# EAGLE board Panel (EAGLE 9.2.2)
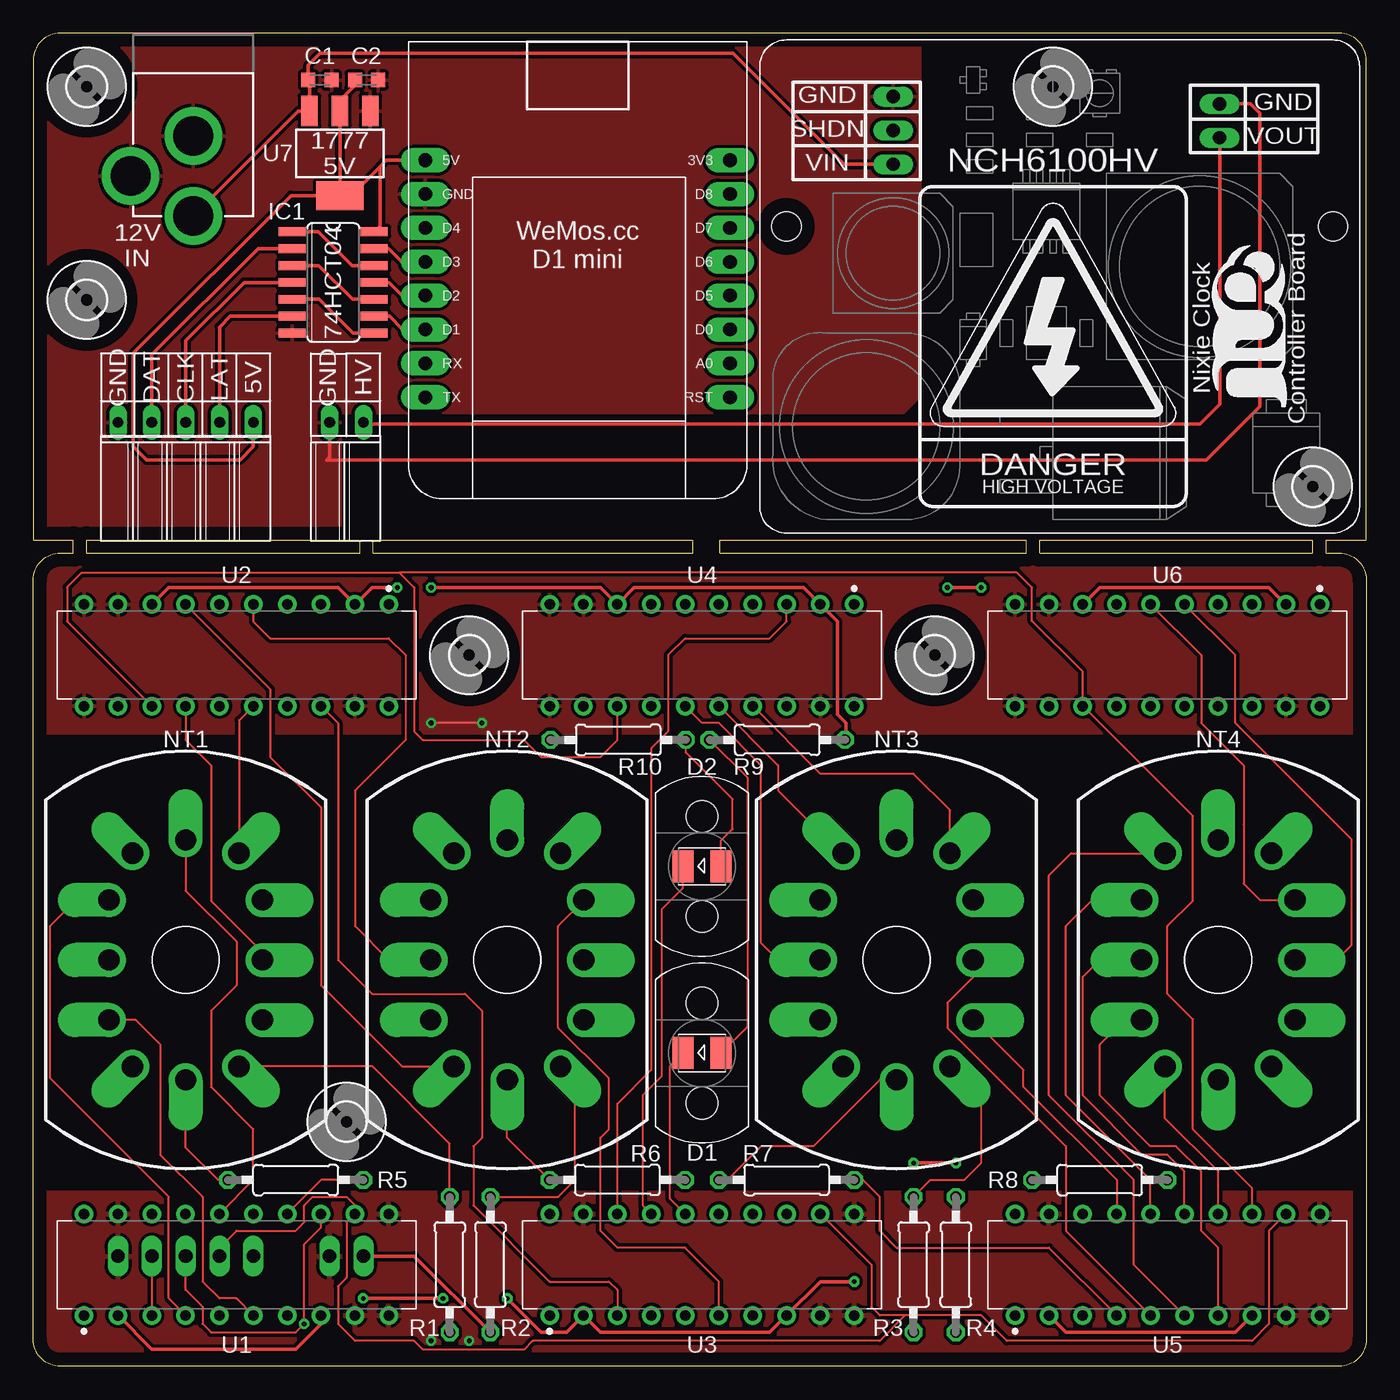
[diagram p0: board, top side]
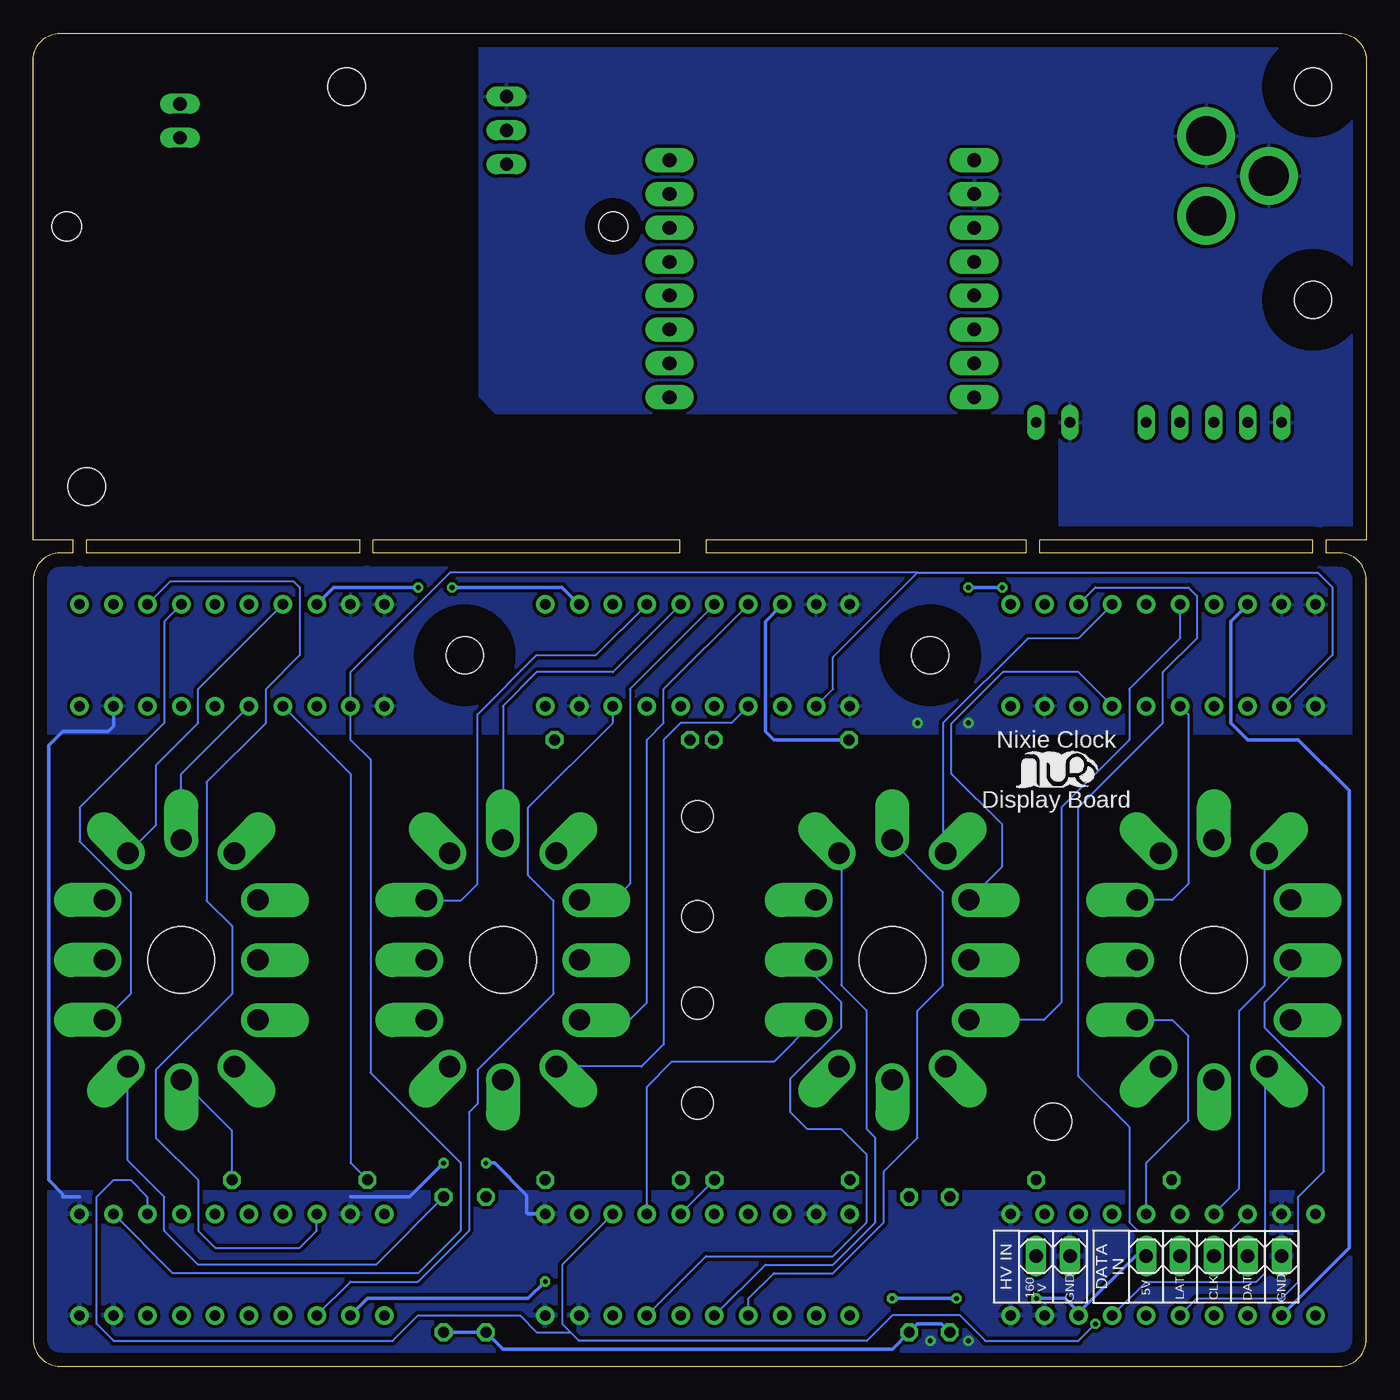
[diagram p1: board, bottom side, seen from below]

Size 100 x 100 mm. Coordinates in mm from the lower left corner, seen from the top.
Outline: 2,0 arc-90 0,2 0,59 arc-90 2,61 3,61 3,62 0,62 0,98 arc-90 2,100 98,100 arc-90 100,98 100,62 97,62 97,61 98,61 arc-90 100,59 100,2 arc-90 98,0 2,0
Outline: 4,61 24.5,61 24.5,62 4,62 4,61
Outline: 25.5,61 49.5,61 49.5,62 25.5,62 25.5,61
Outline: 51.5,61 74.5,61 74.5,62 51.5,62 51.5,61
Outline: 75.5,61 96,61 96,62 75.5,62 75.5,61
Copper layers (1*16): Top 0.035mm / dielectric 1.5mm / Bottom 0.035mm
Design rules "2layer *": minimum track width 6mil, minimum drill 0.35mm, track to track 8mil, track to pad 8mil, pad to pad 8mil, via to via 8mil, smd to smd 6mil, copper to edge 40mil, drill to drill 6mil, minimum pad ring 10mil, minimum via ring 8mil, stop-mask expansion 4mil, vias tented up to drill 40mil, thermal gap 10mil

## Footprints (pad centres in the part's own frame; a part is rotated, then mirrored left to right if it is on the bottom)
C0603K = smd 1.05 x 1.08: 1 -0.875,0; 2 0.875,0
WL-SITW_154141XXBA210 = smd 1.6 x 2.4: 1 -1.425,0; 2 1.425,0
1X05 = drill 1.016 long: 1 -5.08,0; 2 -2.54,0; 3 0,0; 4 2.54,0; 5 5.08,0
FE05W = drill 0.813 long: 1 -5.08,0; 2 -2.54,0; 3 0,0; 4 2.54,0; 5 5.08,0
1X02 = drill 1.016 long: 1 -1.27,0; 2 1.27,0
FE02W = drill 0.813 long: 1 -1.27,0; 2 1.27,0
SO-14 = smd 0.66 x 2.032: 1 -3.81,-3.073; 2 -2.54,-3.073; 3 -1.27,-3.073; 4 0,-3.073; 5 1.27,-3.073; 6 2.54,-3.073; 7 3.81,-3.073; 8 3.81,3.073; 9 2.54,3.073; 10 1.27,3.073; 11 0,3.073; 12 -1.27,3.073; 13 -2.54,3.073; 14 -3.81,3.073
IN-12 = drill 1.6 pad 2.54 offset: 0 5.75,-4.5; 1 -4,-8; 2 -5.75,-4.5; 3 -5.75,0; 4 -5.75,4.5; 5 -4,8; 6 0,9; 7 4,8; 8 5.75,4.5; 9 5.75,0; A 4,-8; LHDP 0,-9 | hole 5: 0,0
0207/10 = drill 0.813 octagon: 1 -5.08,0; 2 5.08,0
PDIP-20 = drill 0.786 pad 1.386: 1 -3.81,11.43; 2 -3.81,8.89; 3 -3.81,6.35; 4 -3.81,3.81; 5 -3.81,1.27; 6 -3.81,-1.27; 7 -3.81,-3.81; 8 -3.81,-6.35; 9 -3.81,-8.89; 10 -3.81,-11.43; 11 3.81,-11.43; 12 3.81,-8.89; 13 3.81,-6.35; 14 3.81,-3.81; 15 3.81,-1.27; 16 3.81,1.27; 17 3.81,3.81; 18 3.81,6.35; 19 3.81,8.89; 20 3.81,11.43
SOT-223 = smd 1.27 x 2.286: 1 -2.286,-3.175; 2 0,-3.175; 3 2.286,-3.175 | smd 3.556 x 2.159: TER 0,3.175
2,8 = hole 2.8: 0,0
MENTOR-1216.1005 = hole 2.4: -3.75,0; 3.75,0
NCH6100HV = drill 1 long: GND1 10,-4.25; GND2 34.5,-4.8; SHDN 10,-6.79; VIN 10,-9.33; VOUT 34.5,-7.34 | hole 2.2: 2,-14; 43,-14
POWER_JACK_PTH = drill 2.997 pad 4.318: GND 0,7.7; GNDBREAK 4.7,10.7; PWR 0,13.7
WEMOS-D1-MINI = drill 1.016 pad 1.829 long: 3V3 -11.43,-12.7; 5V 11.43,-12.7; A0 -11.43,2.54; D0 -11.43,0; D1 11.43,0; D2 11.43,-2.54; D3 11.43,-5.08; D4 11.43,-7.62; D5 -11.43,-2.54; D6 -11.43,-5.08; D7 -11.43,-7.62; D8 -11.43,-10.16; GND 11.43,-10.16; RESET -11.43,5.08; RX 11.43,2.54; TX 11.43,5.08

## Placement (x,y rotation side)
C1  1u  [C0603K]  21.5,96.5 0 top
C2  10u  [C0603K]  25,96.5 0 top
D1  RED/AMBER  [WL-SITW_154141XXBA210]  50.16,23.5 180 top
D2  RED/AMBER  [WL-SITW_154141XXBA210]  50.16,37.5 180 top
DATA  .1" Header  [1X05]  11.43,8.26 180 bottom
DATA1  [FE05W]  11.43,70.81 180 top
HV  .1" Header  [1X02]  23.5,8.26 180 bottom
HV1  1  [FE02W]  23.5,70.81 180 top
IC1  74HCT04D  [SO-14]  22.5,81.31 270 top
NT1  IN-12B  [IN-12]  11.43,30.48 0 top
NT2  IN-12B  [IN-12]  35.56,30.48 0 top
NT3  IN-12B  [IN-12]  64.77,30.48 0 top
NT4  IN-12B  [IN-12]  88.9,30.48 0 top
R1  22k  [0207/10]  31.24,7.62 270 top
R2  22k  [0207/10]  34.29,7.62 270 top
R3  22k+  [0207/10]  66.04,7.62 270 top
R4  22k  [0207/10]  69.22,7.62 270 top
R5  100k  [0207/10]  19.68,13.97 0 top
R6  100k  [0207/10]  43.81,13.97 180 top
R7  100k  [0207/10]  56.52,13.97 180 top
R8  100k  [0207/10]  80.01,13.97 0 top
R9  1k  [0207/10]  55.81,46.99 0 top
R10  1k  [0207/10]  43.88,46.99 180 top
U1  TPIC6B595N  [PDIP-20]  15.24,7.62 90 top
U2  TPIC6B595N  [PDIP-20]  15.24,53.34 270 top
U3  TPIC6B595N  [PDIP-20]  50.16,7.62 90 top
U4  TPIC6B595N  [PDIP-20]  50.16,53.34 270 top
U5  TPIC6B595N  [PDIP-20]  85.09,7.62 90 top
U6  TPIC6B595N  [PDIP-20]  85.09,53.34 270 top
U7  CJT1117-3.3-SOT223  [SOT-223]  23,91 180 top
U$1  [2,8]  67.63,53.34 0 top
U$2  [2,8]  32.7,53.34 0 top
U$3  [2,8]  23.5,18.34 0 top
U$4  [LOGO-SILKSCREEEN-S]  23.25,44.25 0 bottom
U$5  [MENTOR-1216.1005]  50.16,37.5 90 top
U$6  [MENTOR-1216.1005]  50.16,23.5 90 top
U$7  NCH6100HV  [NCH6100HV]  54.5,99.51 0 top
U$8  [LOGO-SILKSCREEN]  92.25,77.89 90 top
U$9  [2,8]  96,66 0 top
U$10  [2,8]  4,80 0 top
U$11  DC-JACK  [POWER_JACK_PTH]  12,100 180 top
U$12  WEMOS-D1  [WEMOS-D1-MINI]  40.84,77.78 180 top
U$13  [2,8]  4,96 0 top
U$14  [2,8]  76.5,96 0 top

## Library data of the parts
C1 C2 = rcl; SPICEPREFIX: C
D1 D2 = Wurth_Elektronik_Optoelectronics_rev18a
DATA HV = pinhead
DATA1 HV1 IC1 NT1-NT4 U1-U6 U$5-U$7 U$12 = NixieClock
R1-R10 = rcl; SPICEPREFIX: R
U7 = NixieClock; MPN: CJT1117-3.3
U$1-U$3 U$9 U$10 U$13 U$14 = holes
U$4 U$8 = OwnStuff
U$11 = Parts

## Nets
+3V3: U$12.3V3
+5V: C2.1 DATA1.1 IC1.14 U7.2 U7.TER U$12.5V
+12V: C1.1 U7.3 U$7.VIN U$11.PWR
DIG10: NT1.0 U1.15
DIG11: NT1.1 U1.7
DIG12: NT1.2 U1.6
DIG13: NT1.3 U1.5
DIG14: NT1.4 U1.4
DIG15: NT1.5 U1.17
DIG16: NT1.6 U1.16
DIG17: NT1.7 U2.16
DIG18: NT1.8 U2.15
DIG19: NT1.9 U2.14
DIG20: NT2.0 U3.14
DIG21: NT2.1 U2.7
DIG22: NT2.2 U2.6
DIG23: NT2.3 U2.5
DIG24: NT2.4 U2.17
DIG25: NT2.5 U2.4
DIG26: NT2.6 U3.4
DIG27: NT2.7 U3.5
DIG28: NT2.8 U3.6
DIG29: NT2.9 U3.7
DIG30: NT3.0 U5.17
DIG31: NT3.1 U4.14
DIG32: NT3.2 U4.7
DIG33: NT3.3 U4.15
DIG34: NT3.4 U4.6
DIG35: NT3.5 U4.16
DIG36: NT3.6 U4.5
DIG37: NT3.7 U4.17
DIG38: NT3.8 U4.4
DIG39: NT3.9 U5.5
DIG40: NT4.0 U6.4
DIG41: NT4.1 U5.14
DIG42: NT4.2 U5.7
DIG43: NT4.3 U5.15
DIG44: NT4.4 U5.16
DIG45: NT4.5 U5.6
DIG46: NT4.6 U6.15
DIG47: NT4.7 U6.7
DIG48: NT4.8 U6.6
DIG49: NT4.9 U6.5
DOT1: R5.2 U1.14
DOT2: R6.1 U3.15
DOT3: R7.1 U5.4
DOT4: R8.1 U6.14
GND: DATA.1 HV.1 U1.9 U1.10 U1.11 U1.19 U2.9 U2.10 U2.11 U2.19 U3.9 U3.10 U3.11 U3.19 U4.9 U4.10 U4.11 U4.19 U5.9 U5.10 U5.11 U5.19 U6.9 U6.10 U6.11 U6.19
GND1: C1.2 C2.2 DATA1.5 HV1.2 IC1.7 U7.1 U$7.GND1 U$7.GND2 U$11.GND U$11.GNDBREAK U$12.GND
LATCH: DATA.4 U1.12 U2.12 U3.12 U4.12 U5.12 U6.12
LED1: D1.2 U3.16
LED2: D2.2 U3.17
N$1: HV1.1 U$7.VOUT
N$2: IC1.5 IC1.8
N$3: IC1.3 IC1.10
N$4: IC1.1 IC1.12
N$6: DATA1.3 IC1.4
N$7: IC1.13 U$12.D3
N$8: DATA1.4 IC1.2
N$45: NT1.LHDP R5.1
N$46: NT2.LHDP R6.2
N$47: NT3.LHDP R7.2
N$48: NT4.LHDP R8.2
N$49: NT1.A R1.1
N$50: NT2.A R2.1
N$51: NT3.A R3.1
N$52: NT4.A R4.1
N$55: U1.18 U2.3
N$56: U2.18 U3.3
N$57: U3.18 U4.3
N$58: U4.18 U5.3
N$59: U5.18 U6.3
N$60: DATA1.2 IC1.6
N$62: IC1.9 U$12.D1
N$63: IC1.11 U$12.D2
N$66: D1.1 R9.1
N$67: D2.1 R10.1
SCLK: DATA.3 U1.13 U2.13 U3.13 U4.13 U5.13 U6.13
SDAT: DATA.2 U1.3
V+: HV.2 R1.2 R2.2 R3.2 R4.2
VCC: DATA.5 R9.2 R10.2 U1.2 U1.8 U2.2 U2.8 U3.2 U3.8 U4.2 U4.8 U5.2 U5.8 U6.2 U6.8

## Tracks (layer width: path | path; a pad name or v marks a point on that pad's centre or on a via)
+5V
  Top 0.254: U7.TER 23,87 26,90 | 26,90 26,85.55 IC1.14 | U7.TER U7.2 23,95 24.12,96.12 C2.1 | U$12.5V 26.48,90.48 26,90 | DATA1.1 16.51,69.01 15.5,68 8.5,68 7.5,69 7.5,76 19.32,87.83 U7.TER
+12V
  Top 0.254: U$7.VIN 60.82,90.18 52.5,98.5 21.5,98.5 20.62,97.62 C1.1 20.71,96.41 U7.3 19.88,94.17 U$11.PWR
DIG10
  Bottom 0.152: U1.15 16.51,15.24 13.34,18.41 13.34,24.77 14.55,25.98 NT1.0
DIG11
  Bottom 0.152: U1.7 16.51,6.35 8.26,6.35 7.62,6.99 7.62,22.29 NT1.1
DIG12
  Top 0.152: NT1.2 7.67,25.98 9.53,24.13 9.53,15.88 12.7,12.7 12.7,6.35 13.97,5.08 15.24,5.08 U1.6
DIG13
  Bottom 0.152: U1.5 12.7,5.08 6.35,5.08 5.08,6.35 5.08,12.7 3.17,14.61 3.17,20.95 7.62,25.4 7.62,27.3 5.68,29.25 NT1.3
DIG14
  Top 0.152: NT1.4 3.23,34.98 1.27,33.02 1.27,21.59 10.16,12.7 10.16,5.08 U1.4
DIG15
  Bottom 0.152: U1.17 9.53,13.34 9.53,26.67 7.62,28.57 7.62,38.29 NT1.5
DIG16
  Top 0.152: NT1.6 11.43,35.67 15.24,31.86 15.24,28.57 13.34,26.67 13.34,20.95 16.51,17.78 16.51,13.97 U1.16
DIG17
  Top 0.152: U2.16 15.43,48.45 NT1.7
DIG18
  Bottom 0.152: U2.15 13.34,48.9 13.34,36.2 14.55,34.98 NT1.8
DIG19
  Top 0.152: U2.14 11.43,46.99 13.34,45.09 13.34,34.92 17.18,31.08 NT1.9
DIG20
  Bottom 0.152: NT2.0 44.44,22.85 44.45,22.86 52.07,22.86 53.98,20.95 U3.14
DIG21
  Top 0.152: U2.7 17.78,50.8 17.78,45.72 21.59,41.91 21.59,28.57 27.68,22.48 NT2.1
DIG22
  Bottom 0.152: U2.6 13.97,54.61 17.78,50.8 17.78,46.99 22.86,41.91 22.86,27.3 24.18,25.98 NT2.2
DIG23
  Top 0.152: U2.5 16.51,55.88 17.78,54.61 26.67,54.61 27.94,53.34 27.94,46.99 24.13,43.18 24.13,33.02 26.67,30.48 NT2.3
DIG24
  Bottom 0.152: U2.17 21.59,52.07 27.27,52.07 31.11,48.23 31.11,44.45 27.3,40.64 27.3,37.48 NT2.4
DIG25
  Bottom 0.152: U2.4 21.59,54.61 25.4,54.61 31.75,48.26 31.75,38.67 NT2.5
DIG26
  Bottom 0.152: U3.4 46.35,5.08 44.45,6.99 40.01,6.99 36.2,10.79 36.2,14.61 33.66,17.14 33.66,26.67 31.75,28.57 31.75,35.56 35.56,39.37 NT2.6
DIG27
  Bottom 0.152: U3.5 45.09,7.62 40.01,7.62 36.83,10.79 36.83,17.14 37.47,17.78 37.47,26.67 39.37,28.57 39.37,38.29 NT2.7
DIG28
  Top 0.152: U3.6 51.44,6.35 48.9,8.89 43.81,8.89 42.55,10.16 42.55,17.14 43.18,17.78 43.18,21.59 39.37,25.4 39.37,33.02 41.31,34.96 NT2.8
DIG29
  Bottom 0.152: U3.7 49.53,8.26 40.01,8.26 37.47,10.79 37.47,15.88 39.37,17.78 41.91,17.78 43.18,19.05 43.18,21.59 39.37,25.4 39.37,27.3 41.31,29.25 NT2.9
DIG30
  Top 0.152: NT3.0 70.54,25.98 74.3,22.23 74.3,20.95 81.28,13.97 U5.17
DIG31
  Bottom 0.152: NT3.1 54.35,22.48 52.7,24.13 52.7,46.99 51.44,48.26 47.62,48.26 U4.14
DIG32
  Bottom 0.152: U4.7 52.7,50.8 52.7,48.26 53.98,46.99 53.98,27.3 55.24,26.04 58.97,26.04 NT3.2
DIG33
  Top 0.152: NT3.3 55.88,30.48 54.61,31.75 54.61,45.09 51.44,48.26 50.16,48.26 U4.15
DIG34
  Bottom 0.152: U4.6 55.24,50.8 55.24,36.2 56.46,34.98 NT3.4
DIG35
  Top 0.152: U4.16 55.88,45.09 55.88,43.18 60.58,38.48 NT3.5
DIG36
  Bottom 0.152: NT3.6 64.77,49.53 62.23,52.07 56.52,52.07 U4.5
DIG37
  Top 0.152: NT3.7 68.77,41.72 66.04,44.45 59.05,44.45 U4.17
DIG38
  Bottom 0.152: NT3.8 70.47,34.92 67.94,34.92 66.67,36.2 66.67,48.9 62.23,53.34 57.78,53.34 U4.4
DIG39
  Top 0.152: NT3.9 70.52,29.21 68.58,27.27 68.58,25.4 77.47,16.51 77.47,10.16 U5.5
DIG40
  Bottom 0.152: U6.4 90.17,55.88 90.17,48.26 96.52,41.91 96.52,39.36 92.71,35.55 92.71,27.92 NT4.0
DIG41
  Top 0.152: U5.14 88.9,14.61 84.9,18.61 NT4.1
DIG42
  Top 0.152: U5.7 88.9,8.89 87.63,10.16 87.63,14.61 85.72,16.51 83.82,16.51 80.01,20.32 80.01,24.13 81.86,25.98 NT4.2
DIG43
  Top 0.152: NT4.3 80.01,30.48 78.74,29.21 78.74,20.32 83.19,15.88 85.09,15.88 86.36,14.61 U5.15
DIG44
  Top 0.152: U5.16 83.82,13.97 77.47,20.32 77.47,33.02 79.38,34.92 83.09,34.92 NT4.4
DIG45
  Top 0.152: U5.6 82.55,7.62 82.55,13.97 76.2,20.32 76.2,36.83 77.85,38.48 NT4.5
DIG46
  Bottom 0.152: U6.15 88.9,44.45 NT4.6
DIG47
  Bottom 0.152: U6.7 87.63,50.8 87.63,48.26 90.81,45.09 90.81,40.58 NT4.7
DIG48
  Top 0.152: U6.6 87.63,53.34 87.63,48.26 90.81,45.09 90.81,40.64 90.81,36.2 92.02,34.98 NT4.8
DIG49
  Top 0.152: U6.5 90.17,53.34 90.17,48.26 98.91,39.52 98.91,31.6 97.79,30.48 NT4.9
DOT1
  Top 0.152: R5.2 21.59,13.97 U1.14
DOT2
  Bottom 0.152: U3.15 R6.1
DOT3
  Top 0.152: R7.1 62.23,13.97 63.5,12.7 63.5,10.16 64.77,8.89 76.2,8.89 U5.4
DOT4
  Bottom 0.152: U6.14 76.2,44.45 76.2,15.24 R8.1
GND  (via drill 0.35)
  Top 0.152: v33.66,48.26 v29.84,48.26
  Top 0.254: v69.22,15.24 v66.04,15.24
  Bottom 0.254: v66.04,15.24 65.41,15.24 63,12.84 63,11.5 62.93,11.43 U3.11 | v69.22,15.24 71.75,12.7 76.2,12.7 | 96.52,12.7 97.79,12.7 97.79,12.9 98.86,13.97 98.86,46.56 97.79,47.62 94.38,47.62 93.98,48.02 U6.19
  other vias: 29.84,1.91 32.7,1.91
  pour Top (isolate 0.254): 0,0 0,13 100,13 100,0
  pour Top (isolate 0.254): 0,61 0,47.5 100,47.5 100,61
  pour Bottom (isolate 0.254): 0,61 0,47.5 100,47.5 100,61
  pour Bottom (isolate 0.254): 0,0 0,13 100,13 100,0
GND1
  Top 0.254: U$7.GND2 91.29,94.71 92,94 92,72 88,68 22,68 22.23,68.22 HV1.2
  pour Top (isolate 0.254): 0,62 0,100 65.5,100 66.5,99 66.5,72.77 65.27,71.54 23,71.54 23,63 22,62
  pour Bottom (isolate 0.254): 0,62 0,100 65.5,100 66.5,99 66.5,72.77 65.27,71.54 23,71.54 23,63 22,62
LATCH
  Top 0.152: U3.12 62.87,7.62 62.87,4.45 63.5,3.81 65.41,3.81 | U5.12 92.71,10.16 92.71,3.17 91.44,1.91 73.03,1.91 71.12,3.81 65.41,3.81 | 65.41,3.81 63.5,1.91 37.47,1.91 36.81,1.25 29.23,1.25 28.57,1.91 24.13,1.91 22.86,3.17 22.86,6 23.5,6.63 23.5,10.79 U1.12 24.13,12.06 23.5,12.7 20.95,12.7 20.32,12.06 20.32,10.79 19.68,10.16 15.24,10.16 13.97,8.89 DATA.4
  Bottom 0.152: U2.12 2.54,53.34 2.54,58.45 3.62,59.54 33.66,59.54 | U4.12 40.01,50.8 40.01,53.19 33.66,59.54 | U5.12 89.53,6.99 71.12,6.99 67.94,10.16 67.94,15.24 74.71,22.01 74.71,45.5 76.2,46.99 U6.12 76.2,52.07 68.73,59.54 33.66,59.54
LED1
  Top 0.152: D1.2 47.74,22.5 47.74,12.59 U3.16
LED2
  Top 0.152: U3.17 45.72,12.06 45.72,20.32 47.16,21.77 47.16,34.29 48.74,35.87 D2.2
N$1
  Top 0.254: HV1.1 24.91,70.81 25.04,70.69 87.5,70.69 89,72.19 U$7.VOUT
N$2
  Top 0.254: IC1.8 24,77.5 21.46,80.04 IC1.5
N$3
  Top 0.254: IC1.10 23.96,80.04 21.42,82.58 IC1.3
N$4
  Top 0.254: IC1.12 23.92,82.58 21.38,85.12 IC1.1
N$6
  Top 0.254: IC1.4 15.81,81.31 11.43,76.93 DATA1.3
N$7
  Top 0.254: U$12.D3 27.64,82.86 26.65,83.85 IC1.13
N$8
  Top 0.254: IC1.2 16.85,83.85 8.89,75.89 DATA1.4
N$45
  Top 0.152: R5.1 13.86,13.97 11.43,16.4 NT1.LHDP
N$46
  Top 0.152: R6.2 35.56,17.14 NT2.LHDP
N$47
  Top 0.152: NT3.LHDP 63.5,21.48 58.53,16.51 54.61,16.51 52.07,13.97 R7.2
N$48
  Bottom 0.152: R8.2 85.09,17.67 NT4.LHDP
N$49
  Top 0.152: R1.1 31.24,16.7 25.46,22.48 NT1.A
N$50
  Top 0.152: R2.1 39.37,12.7 40.64,13.97 40.64,21.4 NT2.A
N$51
  Top 0.152: R3.1 67.31,13.97 69.85,13.97 71.12,15.24 71.12,20.13 NT3.A
N$52
  Bottom 0.152: R4.1 74.3,7.62 87.63,7.62 90.17,10.16 90.17,12.7 92.9,15.43 NT4.A
N$55
  Bottom 0.152: U2.3 20.32,58.42 13.34,58.42 12.7,57.78 12.7,54.61 15.24,52.07 15.24,48.26 21.59,41.91 21.59,21.76 17.78,17.95 17.78,10.79 17.14,10.16 10.16,10.16 U1.18
N$56
  Top 0.152: U2.18 22.86,48.26 22.86,30.48 25.4,27.94 32.38,27.94 33.66,26.67 33.66,17.14 33.02,16.51 33.02,12.06 38.73,6.35 43.18,6.35 43.81,5.71 U3.3
N$57
  Top 0.152: U3.18 43.81,19.68 46.35,22.23 46.35,46.35 47.62,47.62 47.62,53.34 48.9,54.61 55.24,54.61 56.52,55.88 U4.3
N$58
  Bottom 0.152: U5.3 76.2,6.35 71.12,6.35 67.31,10.16 67.31,19.05 66.67,19.68 66.67,22.23 60.96,27.94 60.96,34.92 62.87,36.83 62.87,41.91 56.52,48.26 U4.18
N$59
  Bottom 0.152: U6.3 89.69,58.9 80.49,58.9 80.01,58.42 80.01,53.34 82.55,50.8 82.55,48.26 87,43.81 87,34.92 85.09,33.02 85.09,27.94 90.81,22.23 90.81,17.14 87.63,13.97 87.63,10.16 86.36,8.89 80.01,8.89 78.74,10.16 U5.18
N$60
  Top 0.254: IC1.6 14.77,78.77 13.97,77.97 DATA1.2
N$62
  Top 0.254: U$12.D1 27.72,77.78 26.73,78.77 IC1.9
N$63
  Top 0.254: U$12.D2 27.68,80.32 26.69,81.31 IC1.11
N$66
  Top 0.152: D1.1 53.56,25.47 53.56,44.16 R9.1
N$67
  Top 0.152: D2.1 51.59,39.43 52.46,40.3 52.46,42.54 48.96,46.04 R10.1
SCLK  (via drill 0.35)
  Top 0.152: U2.13 2.54,55.88 2.54,58.45 3.62,59.54 27.46,59.54 | U5.13 91.44,13.34 87,17.78 87,26.04 85.09,27.94 85.09,33.02 87,34.92 87,41.27 U6.13 78.74,52.1 74.96,55.88 74.93,55.88 74.93,58.42 73.81,59.54 27.46,59.54 | 27.46,59.54 28.57,58.42 28.57,47.62 29.21,46.99 36.83,46.99 38.1,45.72 42.55,45.72 43.81,46.99 U4.13 | U1.13 21.59,10.43 20.32,9.16 v20.32,3.17 19.68,2.54 13.34,2.54 12.7,3.17 12.7,4.45 11.43,5.71 DATA.3
  Bottom 0.152: 59.69,2.54 59.05,1.91 37.47,1.91 35.56,3.81 30.48,3.81 28.57,1.91 21.59,1.91 v20.32,3.17 | 59.69,2.54 60.33,3.17 60.33,7.62 U3.13 | 59.69,2.54 62.23,2.54 63.5,3.81 71.12,3.81 73.03,1.91 93.98,1.91 95.25,3.17 95.25,12.7 93.98,13.97 92.71,13.97 91.44,12.7 U5.13
SDAT
  Top 0.152: DATA.2 U1.3
V+
  Top 0.254: HV.2 28.57,8.26 R2.2
  Bottom 0.254: R1.2 31.88,3.17 33.66,3.17 R2.2 35.56,1.27 64.77,1.27 R3.2 R4.2
VCC  (via drill 0.35)
  Top 0.254: U6.8 80.01,58.42 92.71,58.42 U6.2 | v68.58,58.42 v71.12,58.42 | U2.8 10.16,58.42 22.86,58.42 U2.2 25.4,58.42 v27.3,58.42 | v29.84,58.42 42.55,58.42 U4.8 45.09,58.42 57.78,58.42 U4.2 60.33,55.88 60.33,48.9 60.96,48.26 60.96,47.05 R9.2 | v35.56,5.08 38.1,2.54 40.01,2.54 U3.2 42.55,2.54 55.24,2.54 U3.8 59.05,6.35 v61.59,6.35 | U1.2 8.89,1.27 19.68,1.27 21.59,3.17 U1.8 | U5.2 77.47,2.54 90.17,2.54 U5.8 | v24.75,5.08 v30.75,5.08
  Bottom 0.254: U4.8 45.09,55.88 45.09,47.62 44.45,46.99 R10.2 | U4.2 60.33,58.42 v68.58,58.42 | U6.8 77.47,58.42 v71.12,58.42 | v27.3,58.42 v29.84,58.42 | U1.2 1.27,8.89 1.27,43.18 5.08,46.99 8.89,46.99 10.16,48.26 10.16,55.88 U2.8 | v61.59,6.35 62.87,5.08 74.93,5.08 U5.2 | DATA.5 17.34,8.26 21.59,4 U1.8 21.59,4.08 22.59,5.08 v24.75,5.08 | v35.56,5.08 v30.75,5.08

## Text on the board
tPlace: 1777 / 5V | 12V / IN | 74HCT04 | Nixie Clock | Controller Board
bPlace: Nixie Clock | Display Board | DATA / IN | HV IN | GND | DAT | CLK | LAT | 5V | GND | 160 / V
tNames: NCH6100HV | GND | DAT | CLK | LAT | 5V | GND | HV